# Altium PCB WheelBoard[Conflict].PcbDoc
Units mm, origin at the board's own origin, x right, y up, seen from the top; angles counter-clockwise.
Board outline 50 x 30 mm, 2 copper layers (Top Layer, Bottom Layer); 24 components, 20 nets, 104 pads, 4 vias.
Unrouted connection lines stored in the file: 61.
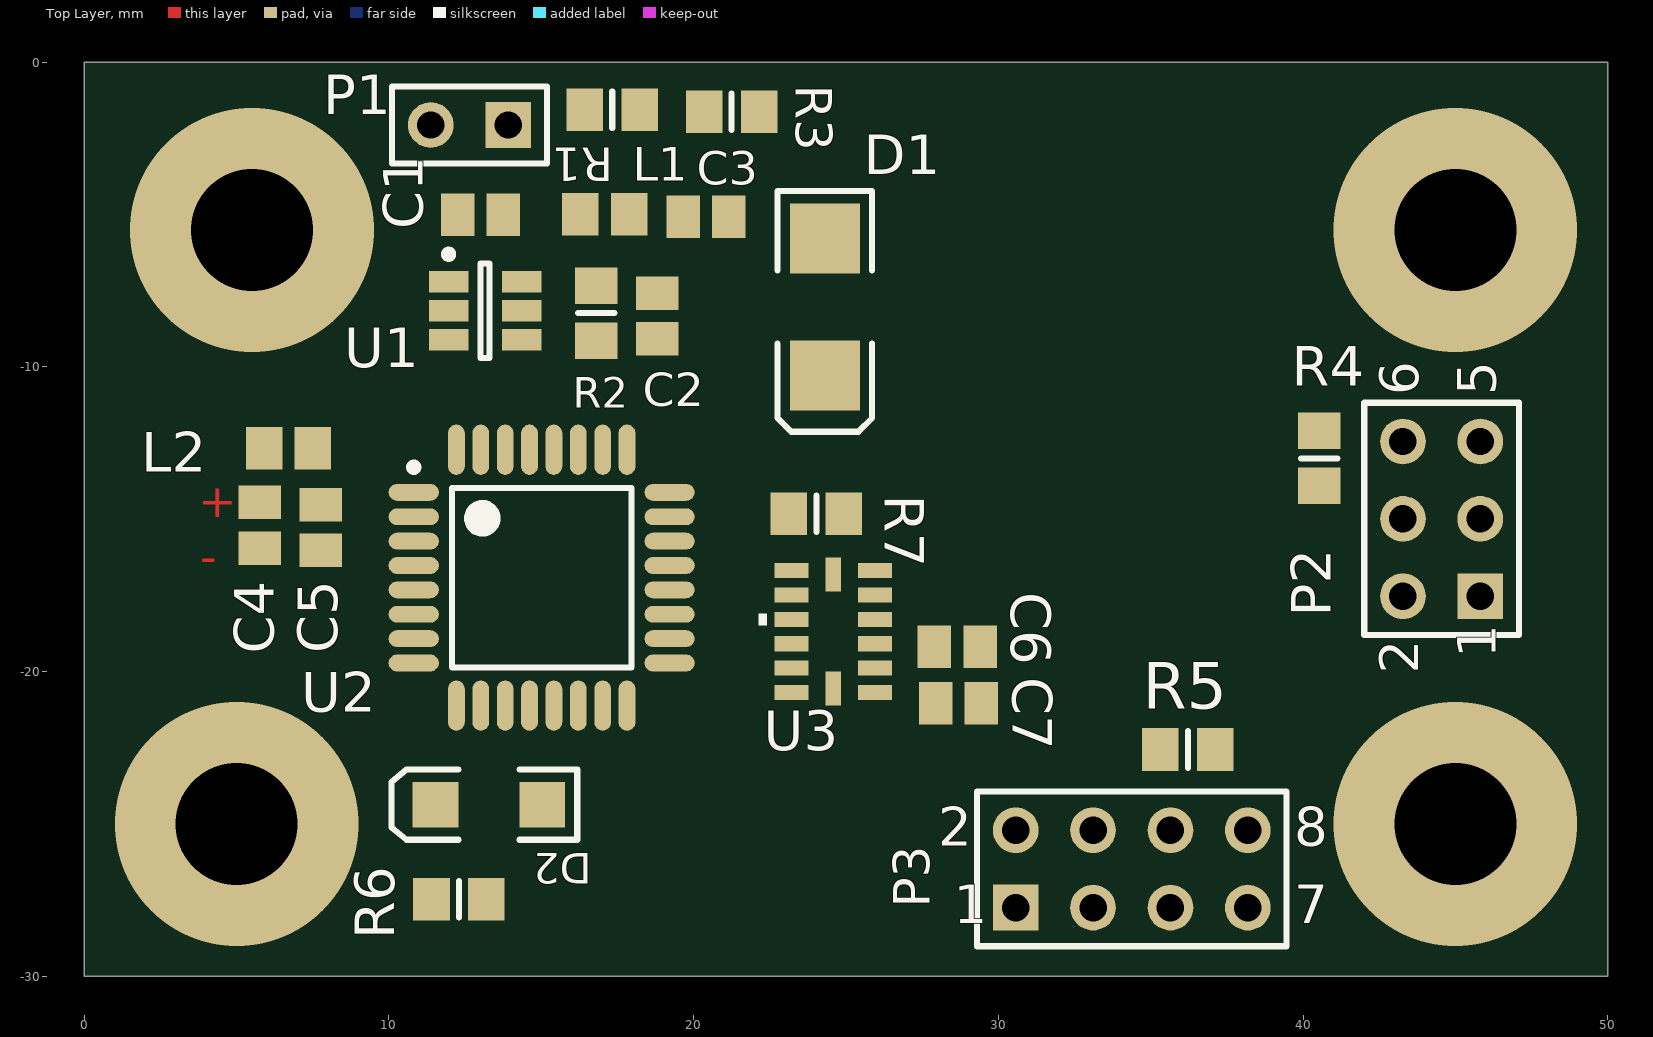
[diagram p0: Top Layer view]
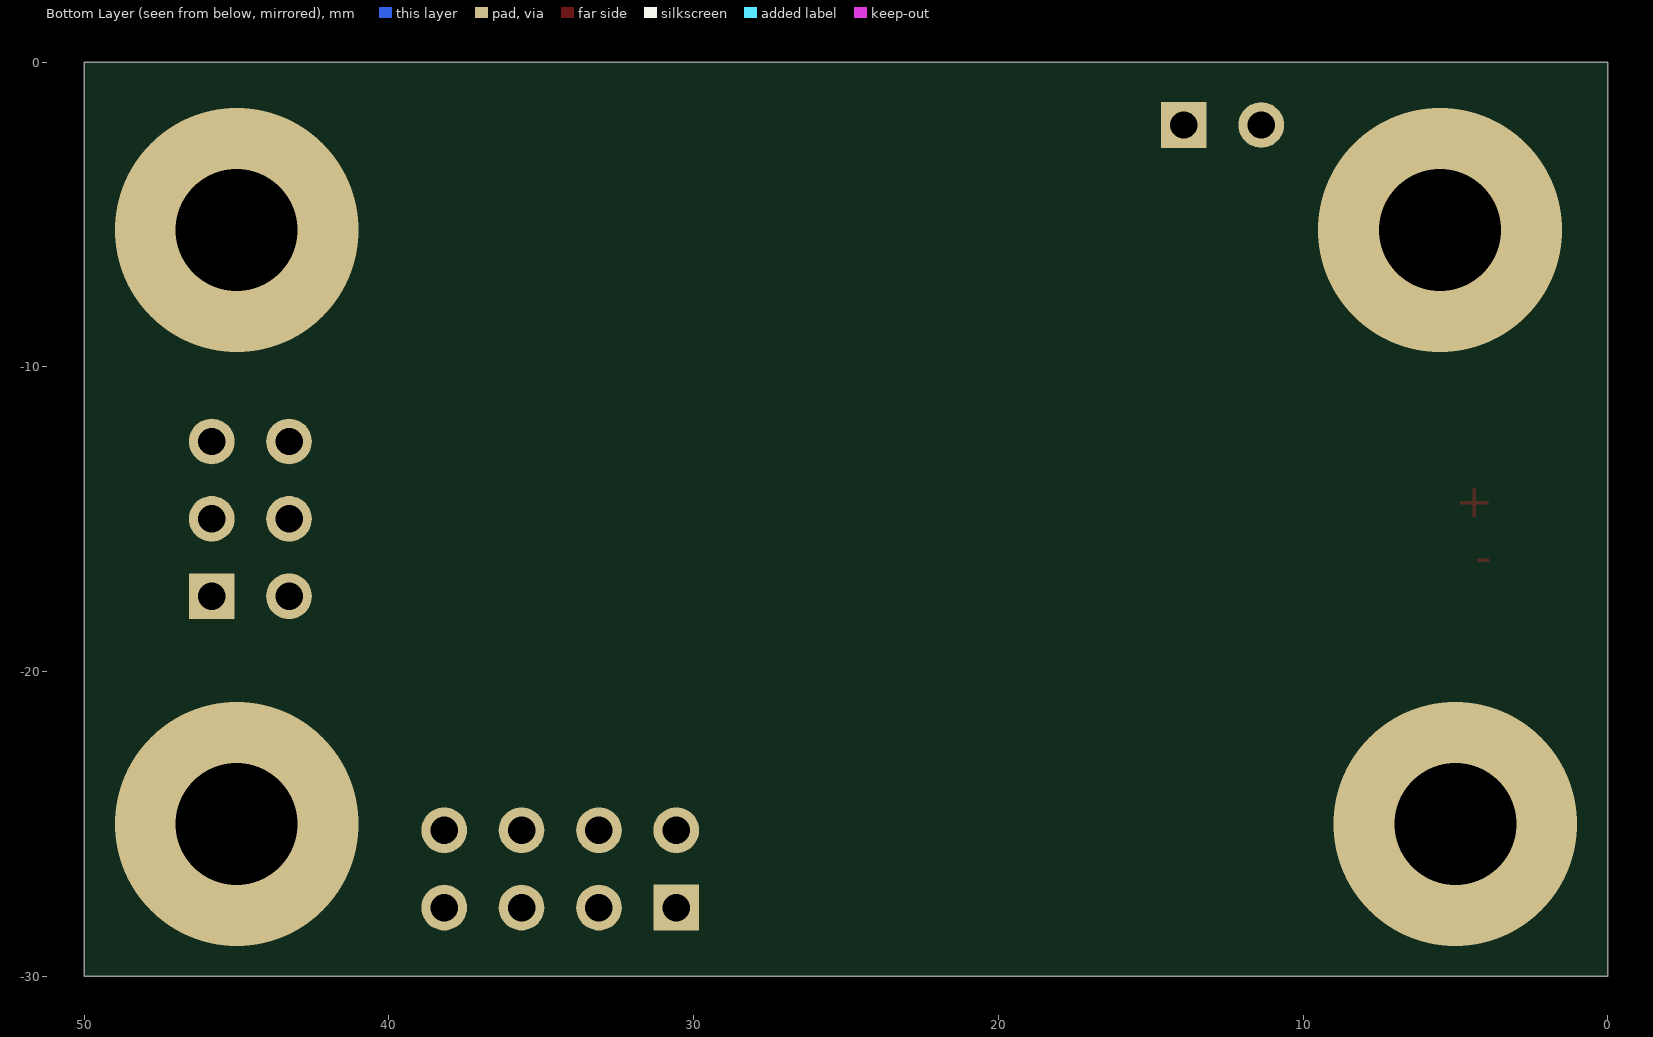
[diagram p1: Bottom Layer view, seen from below]

## Layer stack, top to bottom
Top Solder: solder mask 0.0102, Solder Resist, Dk 3.5
Top Layer: signal copper 0.0356
Dielectric1: dielectric 0.32, FR-4, Dk 4.8
Bottom Layer: signal copper 0.0356
Bottom Solder: solder mask 0.0102, Solder Resist, Dk 3.5

## Board outline
0,-30 0,0 50,0 50,-30

## Design rules (kind name [scope] priority, off if disabled: settings)
Clearance [All] p1: gap=0.3
ComponentClearance [All] p1: gap=0.3 collisioncheckmode=3 verticalgap=0.3 showdistances=FALSE
HoleSize [All] p1: absolutevalues=TRUE maxlimit=4 minlimit=0.7 maxpercent=80.000 minpercent=20.000
HoleToHoleClearance [All] p1: gap=0.15 allowstackedmicrovias=TRUE
MinimumSolderMaskSliver [All] p1: minsoldermaskwidth=0.01
PolygonConnect [All] p1: connectstyle=Relief reliefconductorwidth=0.5 reliefentries=4 polygonreliefangle="90 Angle" airgapwidth=0.3
RoomDefinition Sheet1 [InComponentClass('Sheet1')] p1: confinementstyle=ConfineIn formatcopy=TRUE lockcomponents=FALSE outline -118.11,-71.755 -67.31,-71.755 -67.31,-46.355 -118.11,-46.355
RoutingVias [All] p1: holewidth=0.7 width=1.3 viastyle="Through Hole" minholewidth=0.7 minwidth=1.3 maxholewidth=1.5 maxwidth=3
SilkToSilkClearance [All] p1: silktosilkclearance=0.01
SilkToSolderMaskClearance [IsPad] p1: minsilkscreentomaskgap=0.01 clearancetoexposedcopper=TRUE
SolderMaskExpansion [All] p1: expansion=0.102
UnpouredPolygon [All] p1: allowunpoured=FALSE
Width [All] p1: maxlimit=2 minlimit=0.3 preferedwidth=0.5
23 further rules are at their usual default settings.

## Components (designator, comment, footprint, x,y, rotation, side; value= is the part's Value field where it differs from the comment)
C1 "Cap" C0805 13,-5 r180 top
C2 "Cap" C0805 18.8,-8.327 r90 top
C3 "Cap" C0805 20.404,-5.066 r180 top
C4 "Cap Pol3" C0805 5.76,-15.192 r270 top
C5 "Cap" C0805 7.756,-15.269 r90 top
C6 "Cap" C0805 28.649,-19.183 r0 top
C7 "Cap" C0805 28.697,-21.042 r0 top
D1 "D Schottky" SMB 24.304,-8.027 r270 top
D2 "LED0" 3.2X1.6X1.1 13.278,-24.366 r180 top
L1 "Inductor" 2029 17.085,-4.992 r180 top
L2 "Inductor" 2029 6.7,-12.664 r0 top
P1 "Header 2" HDR1X2 13.911,-2.057 r180 top
P2 "ISP" HDR2X3 45.82,-17.525 r90 top
P3 "NRF Board" HDR2X4 30.569,-27.744 r0 top
R1 "Res1" 6-0805_N 17.329,-1.552 r180 top
R2 "Res1" 6-0805_N 16.799,-8.232 r90 top
R3 "Res1" 6-0805_N 21.248,-1.62 r180 top
R4 "Res1" 6-0805_N 40.53,-12.998 r270 top
R5 "Res1" 6-0805_N 36.22,-22.554 r180 top
R6 "Res1" 6-0805_N 12.295,-27.468 r0 top
R7 "Res1" 6-0805_N 24.028,-14.814 r180 top
U1 "Buck" SOT23-6 13.155,-8.151 r0 top
U2 "ATmega328-AU" 32A_N 15.012,-16.915 r0 top
U3 "ADXL375BCCZ" LGA_CC-14-1 24.58,-18.684 r180 top

## Footprints (in the part's own frame and the unit in brackets; to place one, negate y for a bottom-side part, rotate by r counter-clockwise, add the part's x,y. Pads: shape width x height; smd on the part's side, far side on the other; paste and mask are expansions set on the pad)
3.2X1.6X1.1 [mm] "SMT LED; 2 Flat Leads"
  rect 1.5x1.5 smd: 1(-1.75,0) 2(1.75,0)
  silkscreen extent -2.9,-1.15 3.2,1.15
6-0805_N [mm] "Chip Resistor, Body 2.0x1.2mm, IPC Medium Density"
  rect 1.2x1.4 smd: 1(-0.9,0) 2(0.9,0)
  silkscreen extent 0,-0.6 0,0.6, body extent -1.07,-0.7 1.07,0.7, height 0.7
32A_N [mm] "Thin QFP, 32-Leads, Body 7x7mm, Pitch 0.8mm, IPC Medium Density"
  oval 1.65x0.55 smd: 1(-4.2,2.8) 2(-4.2,2) 3(-4.2,1.2) 4(-4.2,0.4) 5(-4.2,-0.4) 6(-4.2,-1.2) 7(-4.2,-2) 8(-4.2,-2.8) 17(4.2,-2.8) 18(4.2,-2) 19(4.2,-1.2) 20(4.2,-0.4) 21(4.2,0.4) 22(4.2,1.2) 23(4.2,2) 24(4.2,2.8)
  oval 0.55x1.65 smd: 9(-2.8,-4.2) 10(-2,-4.2) 11(-1.2,-4.2) 12(-0.4,-4.2) 13(0.4,-4.2) 14(1.2,-4.2) 15(2,-4.2) 16(2.8,-4.2) 25(2.8,4.2) 26(2,4.2) 27(1.2,4.2) 28(0.4,4.2) 29(-0.4,4.2) 30(-1.2,4.2) 31(-2,4.2) 32(-2.8,4.2)
  silkscreen extent -4.32,-2.95 2.95,3.75, body extent -3.5,-3.5 3.5,3.5, height 1.2
2029 [mm] "Chip Inductor, Body 2.0x1.2mm, IPC High Density"
  rect 1.2x1.4 smd: 1(-0.8,0) 2(0.8,0)
  body extent -1.1,-0.7 1.1,0.7, height 0.55
C0805 [mm] "Chip Capacitor, Body 2.0x1.3mm, IPC High Density"
  rect 1.1x1.4 smd: 1(-0.75,0) 2(0.75,0)
  body extent -1.1,-0.72 1.1,0.72, height 1.4
HDR1X2 [mm] "Connector; Header; 2 Position"
  rect 1.5x1.5 hole 0.9: 1(0,0)
  round 1.5 hole 0.9: 2(2.54,0)
  silkscreen extent -1.27,-1.27 3.81,1.27
HDR2X3 [mm] "Connector; Header; 3x2 Position"
  rect 1.5x1.5 hole 0.9: 1(0,0)
  round 1.5 hole 0.9: 2(0,2.54) 3(2.54,0) 4(2.54,2.54) 5(5.08,0) 6(5.08,2.54)
  silkscreen extent -1.27,-1.27 6.35,3.81
HDR2X4 [mm] "Connector; Header; 4x2 Position"
  rect 1.5x1.5 hole 0.9: 1(0,0)
  round 1.5 hole 0.9: 2(0,2.54) 3(2.54,0) 4(2.54,2.54) 5(5.08,0) 6(5.08,2.54) 7(7.62,0) 8(7.62,2.54)
  silkscreen extent -1.27,-1.27 8.89,3.81
LGA_CC-14-1 [mm]
  rect 1.118x0.5 smd mask+0.025: 1(-1.371,2) 2(-1.371,1.2) 3(-1.371,0.4) 4(-1.371,-0.4) 5(-1.371,-1.2) 6(-1.371,-2) 8(1.371,-2) 9(1.371,-1.2) 10(1.371,-0.4) 11(1.371,0.4) 12(1.371,1.2) 13(1.371,2)
  rect 0.5x1.118 smd mask+0.025: 7(0,-1.871) 14(0,1.871)
  silkscreen extent 2.18,-0.59 2.44,-0.21
SMB [mm] "DO-214-AA/SMB; 2 C-Bend Leads; Body 5.3 x 3.6 mm, inc. leads (LxW)"
  rect 2.3x2.3 smd: 1(-2.25,0) 2(2.25,0)
  silkscreen extent -3.8,-1.55 4.1,1.55
SOT23-6 [mm]
  rect 1.3x0.7 smd: 1(-1.2,0.95) 2(-1.2,0) 3(-1.2,-0.95) 4(1.2,-0.95) 5(1.2,0) 6(1.2,0.95)
  silkscreen extent -1.32,-1.55 0.15,1.97, body extent -0.9,-1.55 0.9,1.55

## Part data
C1 C2 C3 C5 C6 C7: "Capacitor"
C4: "Polarized Capacitor (Surface Mount)"
D1: "Schottky Diode"
D2: "Typical INFRARED GaAs LED"
P1: "Header, 2-Pin"
P2: library part "Header 3X2", "Header, 3-Pin, Dual row"
P3: library part "Header 4X2", "Header, 4-Pin, Dual row"
R1 R2 R3 R4 R5 R6 R7: "Resistor"
U1: library part Component_1
U2: "8-bit AVR Microcontroller, 32KB Flash, 1KB EEPROM, 2KB SRAM, 32-pin TQFP, Industrial Grade (-40°C to 85°C)"
U3: library part ADXL345BCCZ, "Imported"

## Via types
v1: diameter 8, hole 4, Top Layer to Bottom Layer, 4 vias

## Nets (pads, with @x,y where several pads share a name; then routed paths per layer and width w, separated by ;. In a path a pad name is that pad's centre, name@x,y a point inside that pad or via, vN(x,y) a via of type N, cw(c..) or ccw(c..) an arc to the next point about the centre after c; other vN are vias at no path point)
ADXL_CSN: R7.2 U2.24 U3.7
ADXL_IRQ: U2.23 U3.8
GND: C2.1 C4.2 C5.1 P1.2 P2.6 P3.1 R3.1 R6.2 U1.2 U2.3 U2.5 U2.21 U3.2 U3.4 U3.5
MISO: P2.1 P3.7 U2.16 U3.12
MOSI: P2.4 P3.6 U2.15 U3.13
NetC1_1: C1.1 D1.2 L1.1 U1.6
NetC1_2: C1.2 U1.1
NetC3_1: C3.1 D1.1
NetC5_2: C5.2 L2.2 U2.4 U2.6 U2.18
NetD2_1: D2.1 U2.13
NetD2_2: D2.2 R6.1
NetR1_1: R1.1 R3.2
NetR2_1: R2.1 U1.4
NRF_CE: P3.3 U2.27
NRF_CSN: P3.4 R5.1 U2.26
NRF_IRQ: P3.8 U2.25
RST: P2.5 R4.1 U2.29
SCK: P2.3 P3.5 U2.17 U3.14
VCC: C2.2 P1.1 R2.2 U1.5
VREG-3.3: C3.2 C4.1 C6.1 C7.1 L1.2 L2.1 P2.2 P3.2 R1.2 R4.2 R5.2 R7.1 U3.1 U3.6
pads on no net: C6.2 C7.2 U1.3 U2.1 U2.2 U2.7 U2.8 U2.9 U2.10 U2.11 U2.12 U2.14 U2.19 U2.20 U2.22 U2.28 U2.30 U2.31 U2.32 U3.3 U3.9 U3.10 U3.11
copper on no net:
  other v1: 5,-25 45,-25 5.5,-5.5 45,-5.5

## Other copper
Top Layer:
  text "+" at 3.734,-14.924 h1.1
  text "-" at 3.798,-16.763 h1.1

## Text inside footprints (layer, text, board x,y; h text height)
P2: Top Overlay "6" at 43.788,-10.921 h1.27 r90; Top Overlay "5" at 46.328,-10.921 h1.27 r90; Top Overlay "2" at 43.788,-20.065 h1.27 r90; Top Overlay "1" at 46.328,-19.557 h1.27 r90
P3: Top Overlay "2" at 28.029,-25.712 h1.27; Top Overlay "1" at 28.537,-28.252 h1.27; Top Overlay "7" at 39.713,-28.252 h1.27; Top Overlay "8" at 39.713,-25.712 h1.27